# Altium PCB 10ADCDC.PcbDoc
Units mm, origin at the board's own origin, x right, y up, seen from the top; angles counter-clockwise.
Board outline 36 x 25 mm, 4 copper layers (Top Layer, Int1 (GND), Int2 (PWR), Bottom Layer), stack 1.585 mm thick; 44 components, 18 nets, 107 pads, 110 vias.
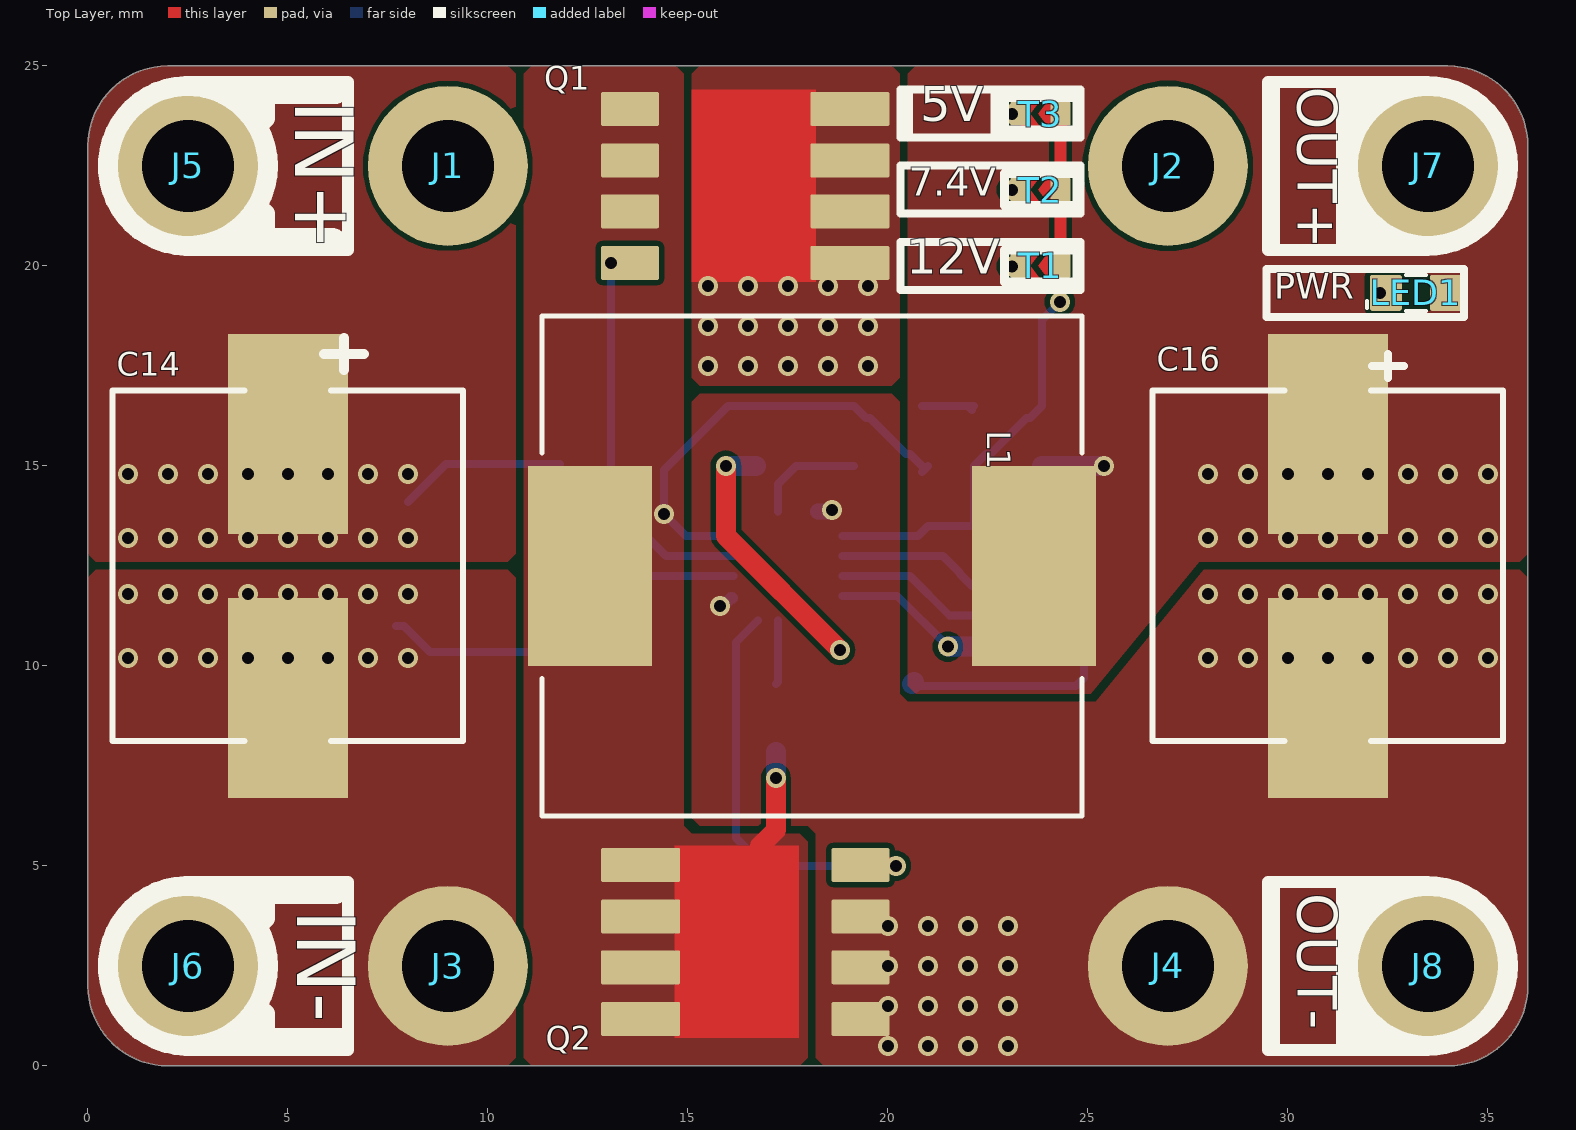
[diagram p0: Top Layer view]
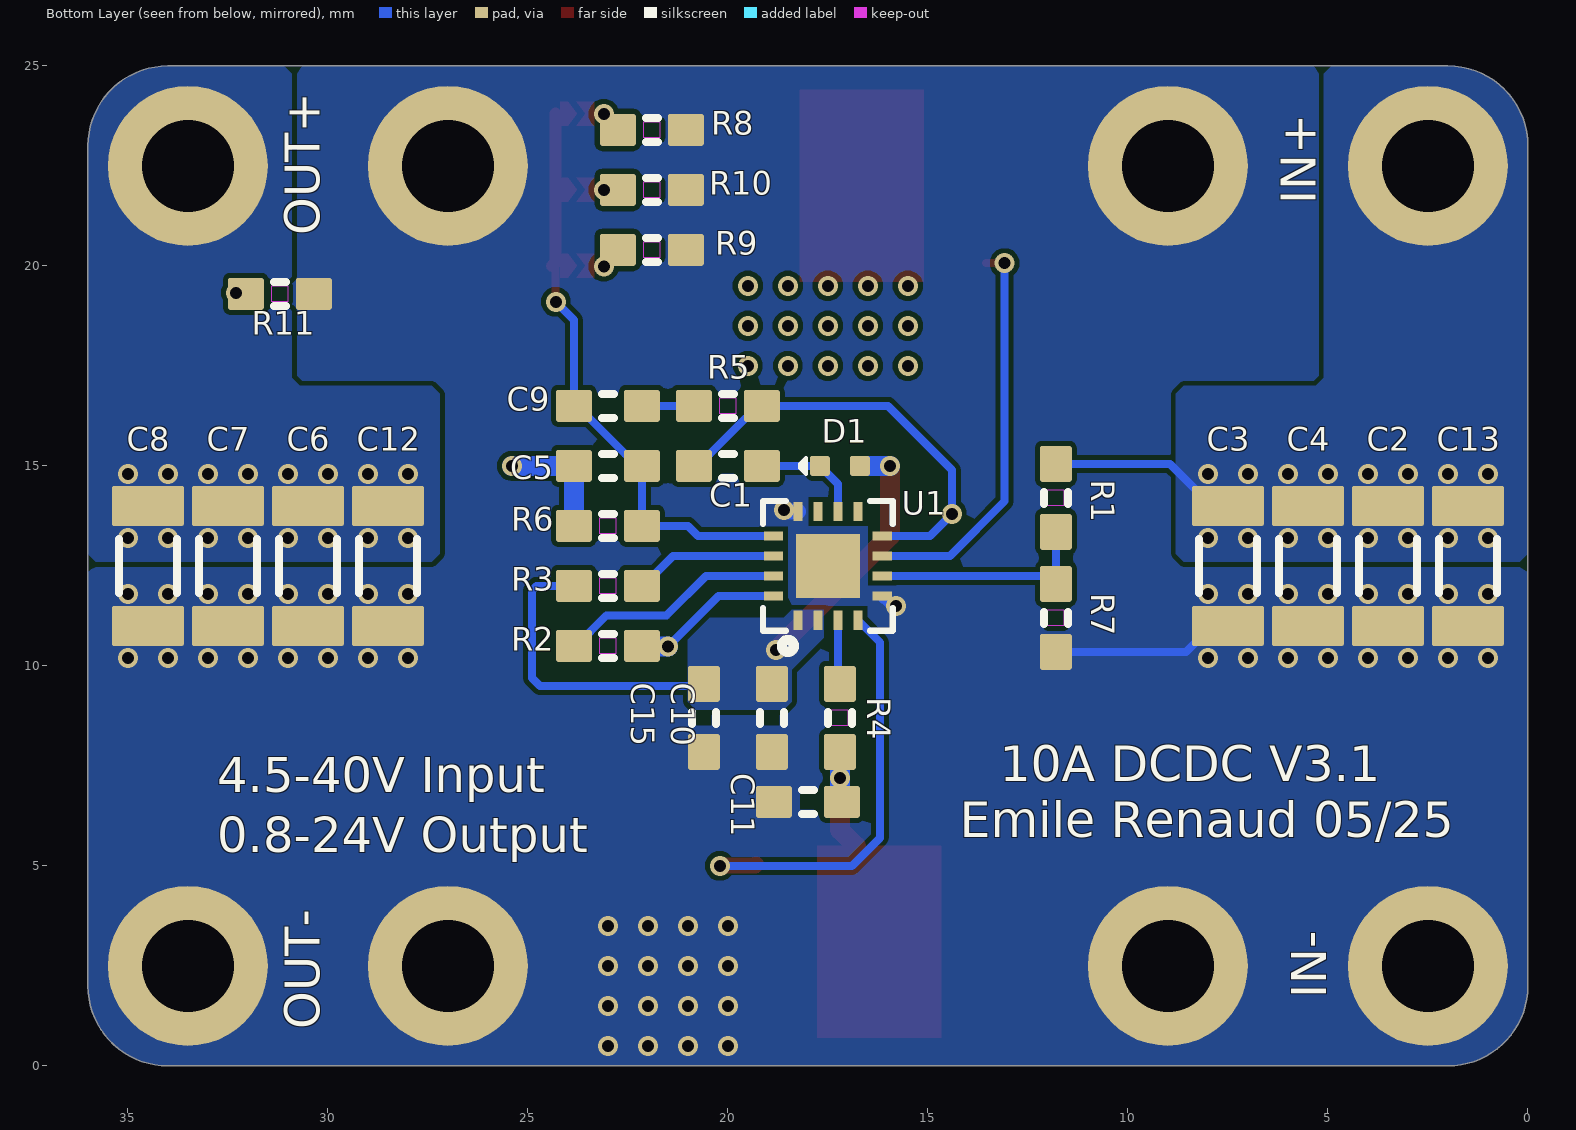
[diagram p1: Bottom Layer view, seen from below]
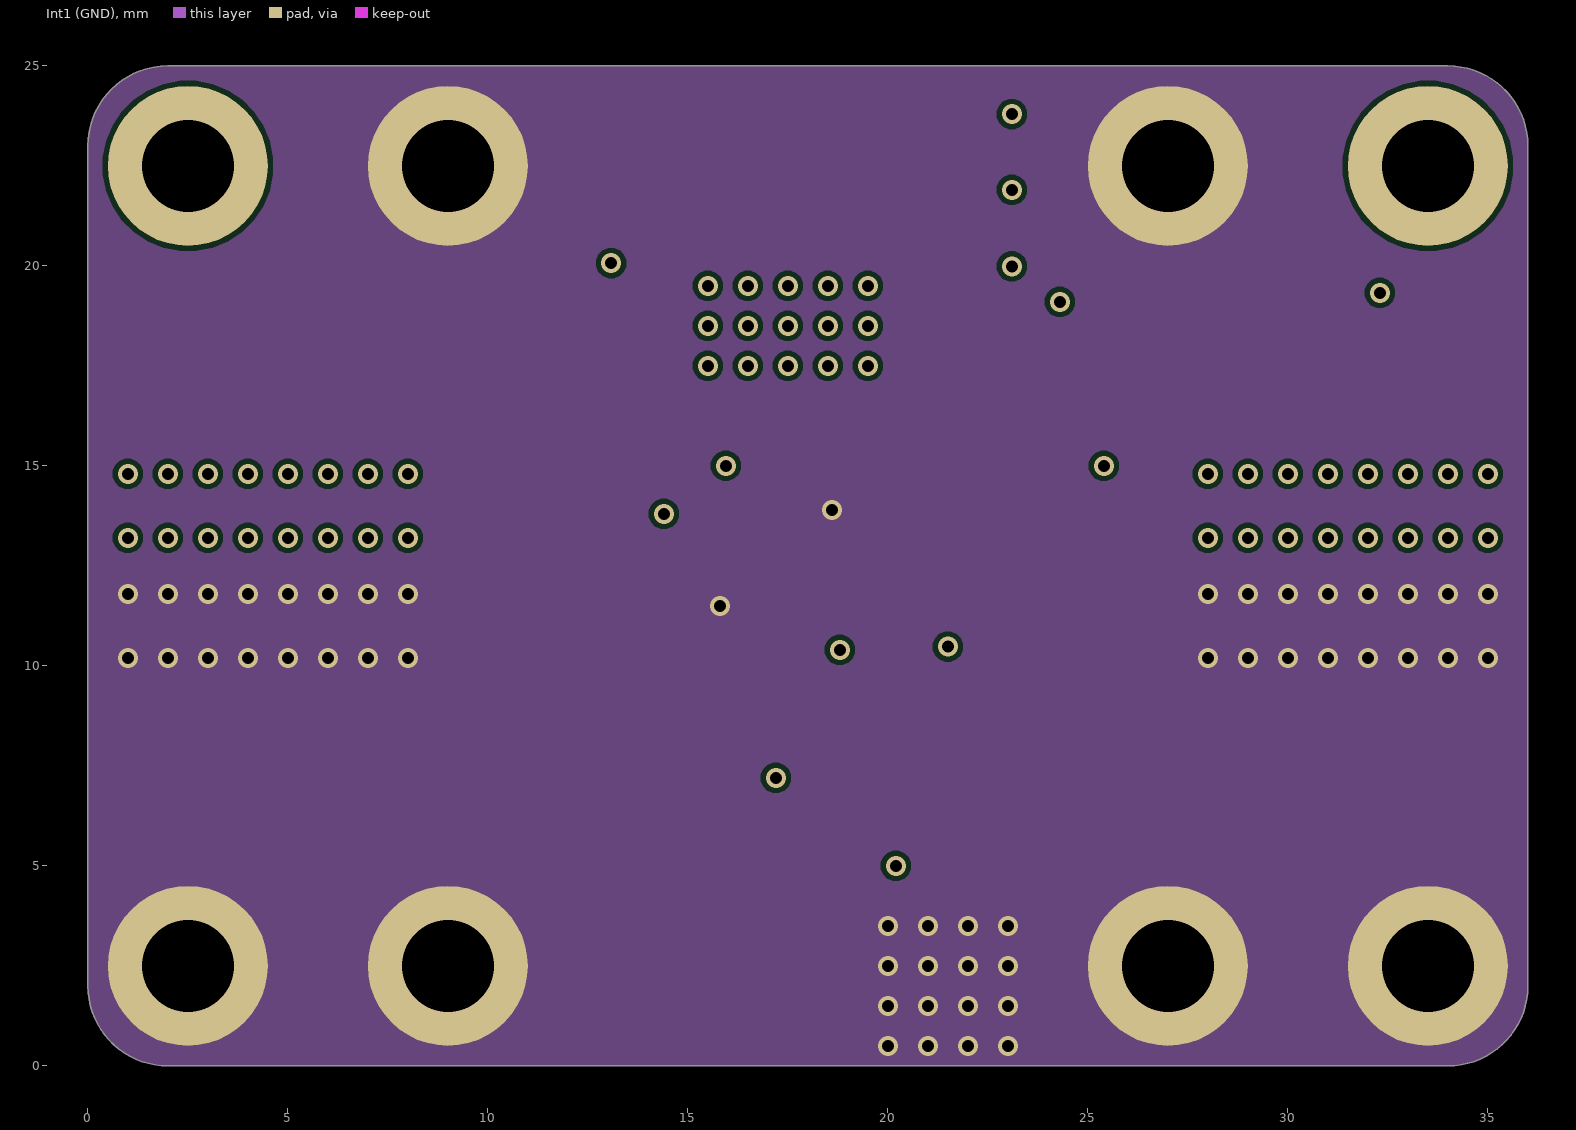
[diagram p2: Int1 (GND)]
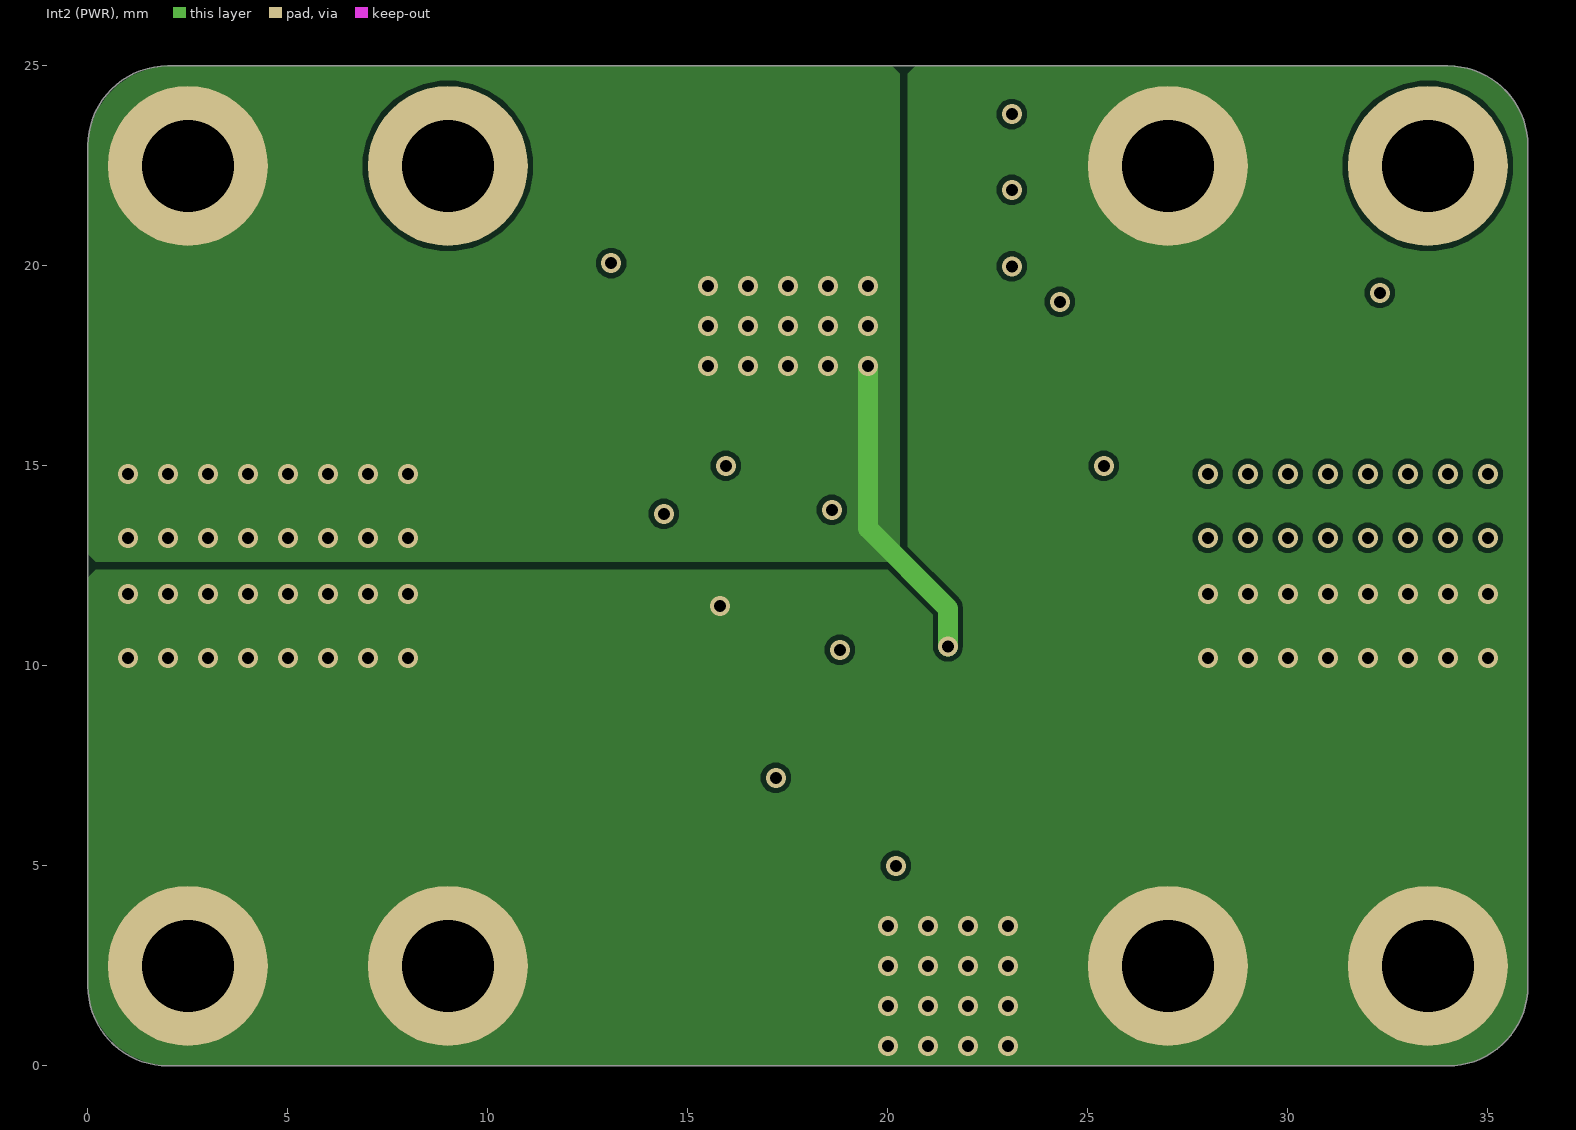
[diagram p3: Int2 (PWR)]
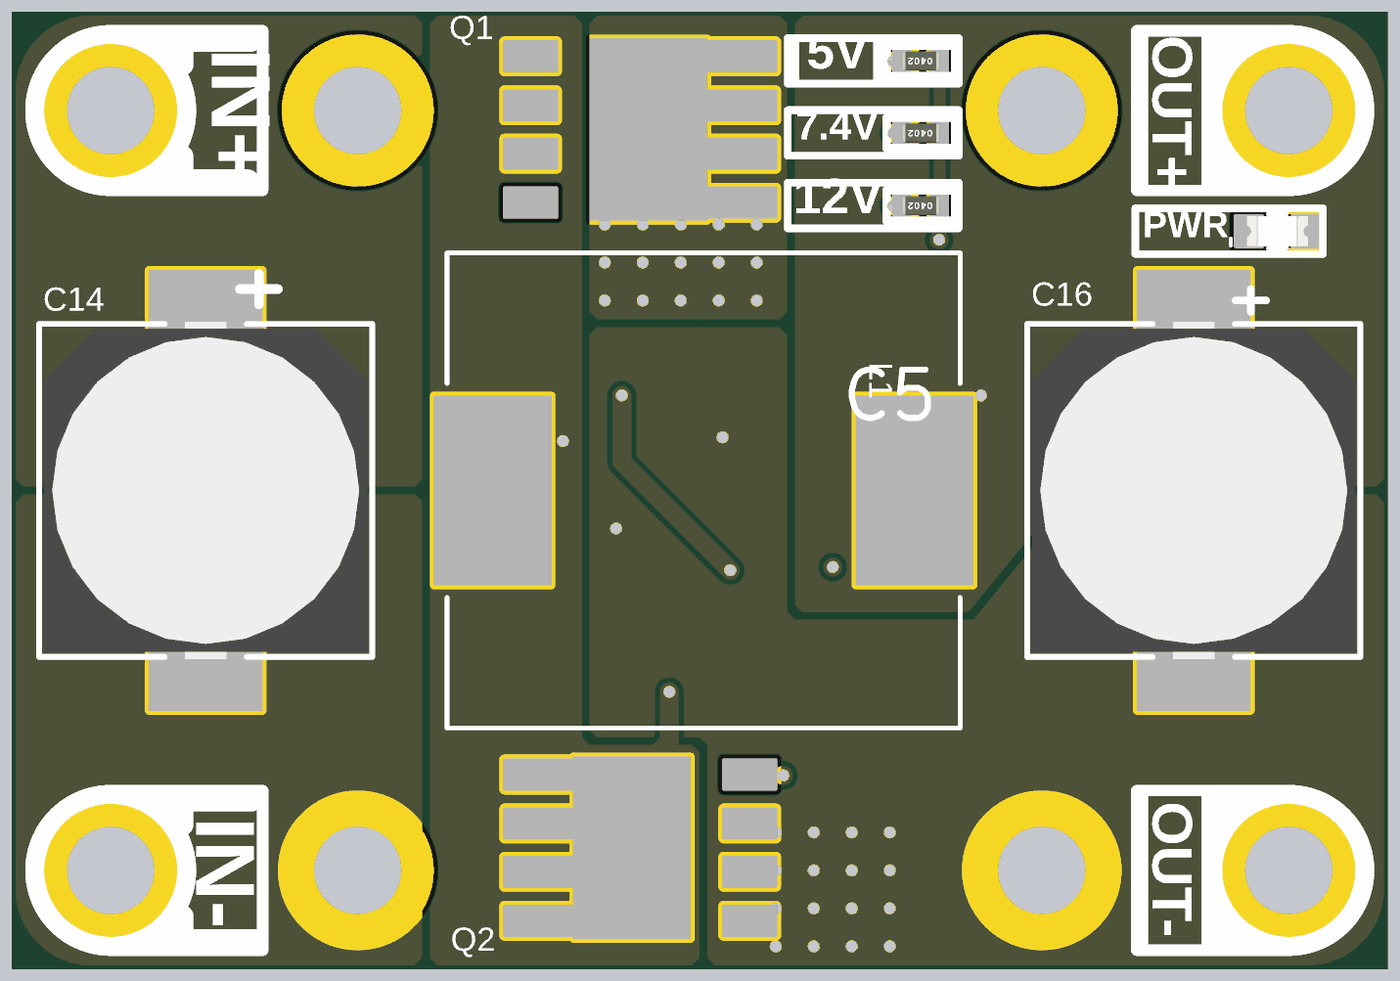
[diagram p4: 3D render of the assembled board from above, using the file's embedded part models]
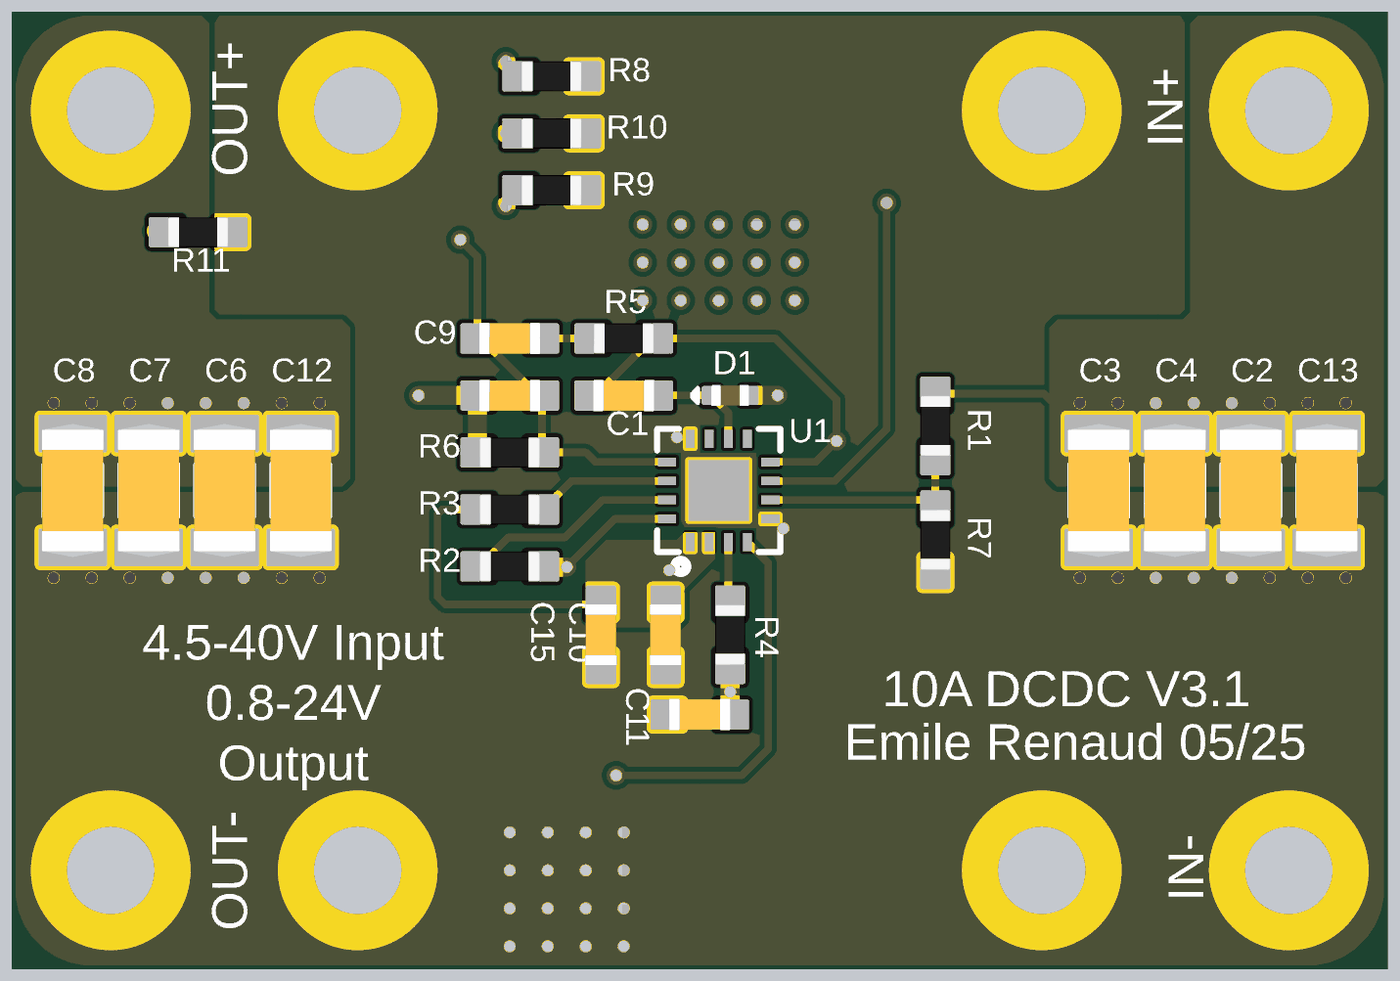
[diagram p5: 3D render of the assembled board from below, using the file's embedded part models]

## Layer stack, top to bottom
Top Solder: solder mask 0.035, SM-001, Dk 4
Top Layer: signal copper 0.035
Dielectric 2: prepreg 0.21, PP-017, Dk 4.6
Int1 (GND): signal copper 0.015
Dielectric 3: core 1.065, Core-039, Dk 4.6
Int2 (PWR): signal copper 0.015
Dielectric 4: prepreg 0.21, PP-017, Dk 4.6
Bottom Layer: signal copper 0.035
Bottom Solder: solder mask 0.035, SM-001, Dk 4

## Board outline
0,2 0,23 cw(c2,23) 2,25 34,25 cw(c34,23) 36,23 36,2 cw(c34,2) 34,0 2,0 cw(c2,2)

## Design rules (kind name [scope] priority, off if disabled: settings)
Clearance Clearance_Power [InNetClass('Power')] p1: gap=0.3 ignorepadtopadclearanceinfootprint=FALSE except(0.127: SMDPad-SMDPad SMDPad-THPad SMDPad-Via SMDPad-Fill SMDPad-Poly SMDPad-Region SMDPad-Text SMDPad-Hole THPad-THPad THPad-Via THPad-Fill THPad-Poly THPad-Region THPad-Text THPad-Hole)
Clearance Clearance_signal [All] p2: gap=0.125 ignorepadtopadclearanceinfootprint=FALSE
ComponentClearance [All] p1 off: gap=0.254 collisioncheckmode=3 verticalgap=0.254 showdistances=FALSE
HoleSize [All] p1 off: absolutevalues=TRUE maxlimit=2.54 minlimit=0.025 maxpercent=80.000 minpercent=20.000
MinimumSolderMaskSliver [All] p1 off: minsoldermaskwidth=0.254
PasteMaskExpansion [All] p1 off: expansion=0
PolygonConnect PolygonConnect_Power [InNetClass('Power')] p1: connectstyle=Direct reliefconductorwidth=0.254 reliefentries=4 polygonreliefangle="90 Angle" airgapwidth=0.254
PolygonConnect [All] p2: connectstyle=Direct reliefconductorwidth=0.254 reliefentries=4 polygonreliefangle="90 Angle" airgapwidth=0.254
RoutingVias [All] p1: holewidth=0.3 width=0.5 viastyle="Through Hole" minholewidth=0.15 minwidth=0.25 maxholewidth=1 maxwidth=1.3
SilkToSolderMaskClearance [IsPad] p1 off: minsilkscreentomaskgap=0.254 clearancetoexposedcopper=TRUE
SolderMaskExpansion [All] p1 off: expansion=0.102 istentingtop=FALSE
Width Width_Power(5A) [InNetClass('Power')] p1: maxlimit=2 minlimit=0.5 preferedwidth=1.25 minimp=50.000000 maximp=50.000000 favimp=50.000000
Width Width_signal [All] p2: maxlimit=1 minlimit=0.1 preferedwidth=0.2 minimp=50.000000 maximp=50.000000 favimp=50.000000
25 further rules are at their usual default settings.

## Components (designator, comment, footprint, x,y, rotation, side; value= is the part's Value field where it differs from the comment)
C1 "Capacitor-0603-0.1uF-50V-X7R" CAPACITOR-0603 20,15 r180 bottom value=0.1uF
C2 "Capacitor-1206-10uF-50V-X5R" CAPACITOR-1206 3.5,12.5 r90 bottom value=10uF
C3 "Capacitor-1206-10uF-50V-X5R" CAPACITOR-1206 7.5,12.5 r90 bottom value=10uF
C4 "Capacitor-1206-10uF-50V-X5R" CAPACITOR-1206 5.5,12.5 r90 bottom value=10uF
C5 "Capacitor-0603-0.1uF-50V-X7R" CAPACITOR-0603 23,15 r0 bottom value=5.6nF
C6 "Capacitor-1206-10uF-50V-X5R" CAPACITOR-1206 30.5,12.5 r90 bottom value=10uF
C7 "Capacitor-1206-10uF-50V-X5R" CAPACITOR-1206 32.5,12.5 r90 bottom value=10uF
C8 "Capacitor-1206-10uF-50V-X5R" CAPACITOR-1206 34.5,12.5 r90 bottom value=10uF
C9 "Capacitor-0603-0.1uF-50V-X7R" CAPACITOR-0603 23,16.5 r180 bottom value=0.1uF
C10 "Capacitor-0603-0.1uF-50V-X7R" CAPACITOR-0603 18.9,8.7 r90 bottom value=0.1uF
C11 "Capacitor-0603-10pF-50V-C0G" CAPACITOR-0603 18,6.6 r180 bottom value=10pF
C12 "Capacitor-1206-10uF-50V-X5R" CAPACITOR-1206 28.5,12.5 r90 bottom value=10uF
C13 "Capacitor-1206-10uF-50V-X5R" CAPACITOR-1206 1.5,12.5 r90 bottom value=10uF
C14 "CAP ALUM 100UF 20% 25V SMD" CAP_J-V_8X10P5_RUB 5,12.5 r270 top value=100uF
C15 "Capacitor-0603-1uF-25V-X5R" CAPACITOR-0603 20.6,8.7 r90 bottom value=1uF
C16 "CAP ALUM 100UF 20% 25V SMD" CAP_J-V_8X10P5_RUB 31,12.5 r270 top value=100uF
D1 "CDBQR0130L" Diode-0402 17.2,15 r0 bottom
J1 "hole" HOLE-M2-Bolt 9,22.5 r0 top
J2 "hole" HOLE-M2-Bolt 27,22.5 r0 top
J3 "hole" HOLE-M2-Bolt 9,2.5 r0 top
J4 "hole" HOLE-M2-Bolt 27,2.5 r0 top
J5 "hole" HOLE-M2-Bolt 2.5,22.5 r0 top
J6 "hole" HOLE-M2-Bolt 2.5,2.5 r0 top
J7 "hole" HOLE-M2-Bolt 33.5,22.5 r0 top
J8 "hole" HOLE-M2-Bolt 33.5,2.5 r0 top
L1 "SRP1265A-6R8M" IND_SRP1265A-6R8M 18.1,12.5 r0 top value=6.8uH
LED1 "3147-B1931NB--20C007614U1930CT-ND" LED-0603-2PIN 33.2,19.325 r0 top
Q1 "AONS66920" DFN-8-5x6-Power 16.3,22 r270 top
Q2 "AONS66920" DFN-8-5x6-Power 16.566,3.1 r90 top
R1 "SMT resistor" Resistor-0603 11.8,14.2 r90 bottom value=100k
R2 "SMT resistor" Resistor-0603 23,10.5 r180 bottom value=100k
R3 "SMT resistor" Resistor-0603 23,12 r0 bottom value=100k
R4 "SMT resistor" Resistor-0603 17.2,8.7 r270 bottom value=2.2k
R5 "SMT resistor" Resistor-0603 20,16.5 r180 bottom value=91k
R6 "SMT resistor" Resistor-0603 23,13.5 r0 bottom value=10k
R7 "SMT resistor" Resistor-0603 11.8,11.2 r90 bottom value=100k
R8 "SMT resistor" Resistor-0603 21.9,23.4 r0 bottom value=1.91k
R9 "SMT resistor" Resistor-0603 21.9,20.4 r0 bottom value=1.91k
R10 "SMT resistor" Resistor-0603 21.9,21.9 r0 bottom value=1.91k
R11 "SMT resistor" Resistor-0603 31.2,19.3 r0 bottom value=1.91k
T1 "NetTie_0402" NetTie-0402 23.814,20 r180 top
T2 "NetTie_0402" NetTie-0402 23.814,21.91 r180 top
T3 "NetTie_0402" NetTie-0402 23.814,23.806 r180 top
U1 "MIC2104YML-TR" "VQFN-16 3x3" 17.5,12.5 r90 bottom

## Footprints (in the part's own frame and the unit in brackets; to place one, negate y for a bottom-side part, rotate by r counter-clockwise, add the part's x,y. Pads: shape width x height; smd on the part's side, far side on the other; paste and mask are expansions set on the pad)
CAP_J-V_8X10P5_RUB [mm]
  rect 5x3 smd paste+0: 1(-3.302,0) 2(3.302,0)
  silkscreen extent -4.38,-4.38 4.38,4.38, body extent -4.45,-4.25 4.45,4.25, height 10.54
CAPACITOR-0603 [mm] "Metric 1608, EIA 0603. Per Yageo Product Specification V2.2"
  rrect15% 0.9x0.8 smd: 1(-0.85,0) 2(0.85,0)
  Top Layer pour cut-out: -0.2,0.2 0.2,0.2 0.2,-0.2 -0.2,-0.2
  silkscreen extent -0.15,-0.3 0.15,0.3, body extent -0.93,-0.41 0.93,0.41, height 0.81
CAPACITOR-1206 [mm] "Metric 3216, EIA 1206, Per Yageo Product Specification V2.2"
  rrect10% 1x1.8 smd: 1(-1.5,0) 2(1.5,0)
  silkscreen extent -0.67,-0.72 0.67,0.72, body extent -1.75,-0.81 1.75,0.81, height 1.61
DFN-8-5x6-Power [mm] "PowerVDFN 8 pins, per Toshiba SOP Advance https://toshiba.semicon-storage.com/ap-en/design-support/package/detail.SOP%20Advance.html"
  rrect10% 0.85x1.45 smd: 1(-1.925,-2.75) 2(-0.635,-2.75) 3(0.635,-2.75) 4(1.925,-2.75)
  rrect10% 0.85x1.981 smd: 5(1.925,2.75) 6(0.635,2.75) 7(-0.635,2.75) 8(-1.925,2.75)
  Top Layer region: -2.4,1.9 2.4,1.9 2.4,-1.2 -2.4,-1.2
  body extent -2.5,-2.5 2.5,2.5, height 0.96
Diode-0402 [mm] "Metric 1005, EIA 0402. Per Yageo Product Specification V2.6"
  rrect25% 0.5x0.5 smd: 1(-0.5,0) 2(0.5,0)
  Top Layer pour cut-out: -0.3,0.25 0.3,0.25 0.3,-0.25 -0.3,-0.25
  silkscreen extent 0.85,-0.2 1,0.2, body extent -0.5,-0.27 0.5,0.28, height 0.51
HOLE-M2-Bolt [mm] "Hole M2 Bolt"
  round 4 hole 2.3: 1(0,0)
IND_SRP1265A-6R8M [mm]
  rect 3.1x5 smd: 1(-5.55,0) 2(5.55,0)
  silkscreen extent -6.75,-6.25 6.75,6.25, body extent -6.7,-6.2 6.7,6.2, height 6.4
LED-0603-2PIN [mm] "Metric 1608, EIA 0603. Per Yageo Product Specification V2.2"
  rrect15% 0.8x0.9 smd: 1(-0.75,0) 2(0.75,0)
  Top Layer pour cut-out: -0.35,0.45 0.35,0.45 0.35,-0.45 -0.35,-0.45
  silkscreen extent -1.22,-0.45 0.25,0.45, body extent -0.8,-0.4 0.8,0.4, height 0.8
NetTie-0402 [mm] "Metric 1005, EIA 0402 Drawn per Yageo \"Chip resistors Mounting\" rev 10"
  rrect15% 0.5x0.6 smd: 1(-0.5,0) 2(0.5,0)
  Top Layer region: -0.375,0.3 -0.175,0.3 0.05,0 -0.175,-0.3 -0.375,-0.3
  Top Layer region: 0.475,0.3 0.025,0.3 0.25,0 0.025,-0.3 0.375,-0.3 0.475,-0.3
  body extent -0.51,-0.25 0.51,0.25, height 0.51
Resistor-0603 [mm] "Metric 1608, EIA 0603 Drawn per Yageo \"Chip resistors Mounting\" rev 10"
  rrect15% 0.9x0.8 smd: 1(-0.85,0) 2(0.85,0)
  Top Layer pour cut-out: -0.2,0.2 0.2,0.2 0.2,-0.2 -0.2,-0.2
  Top Layer keep-out region: -0.2,0.2 0.2,0.2 0.2,-0.2 -0.2,-0.2
  silkscreen extent -0.15,-0.3 0.15,0.3, body extent -0.8,-0.4 0.8,0.4, height 0.55
"VQFN-16 3x3" [mm]
  rect 0.48x0.23 smd paste+0 mask+0.08: 1(-1.36,0.75) 2(-1.36,0.25) 3(-1.36,-0.25) 4(-1.36,-0.75) 9(1.36,-0.75) 10(1.36,-0.25) 11(1.36,0.25) 12(1.36,0.75)
  rect 0.23x0.48 smd paste+0 mask+0.08: 5(-0.75,-1.36) 6(-0.25,-1.36) 7(0.25,-1.36) 8(0.75,-1.36) 13(0.75,1.36) 14(0.25,1.36) 15(-0.25,1.36) 16(-0.75,1.36)
  rect 1.6x1.6 smd paste+0 mask+0.08: 17(0,0)
  silkscreen extent -2.15,-1.62 1.62,1.62, body extent -1.5,-1.5 1.5,1.5, height 0.91

## Part data
C1 C9 C10: Package / Case="Metric 1608, EIA 0603", Supplier Part Number 1=1276-1935-2-ND, Volt=50V, Mounted=Yes, Precision=X7R-10%, Supplier 1=Digi-Key, Supplier 2=Digi-Key, Supplier Part Number 2=1276-1934-2-ND
C2 C3 C4 C6 C7 C8 C12 C13: Package / Case="Metric 3216, EIA 1206", Supplier Part Number 1=1276-2876-1-ND, Volt=50V, Mounted=Yes, Precision=X5R-10%, Supplier 1=Digi-Key, Supplier 2=Digi-Key
C5: library part Capacitor-0603-5.6nF-50V-X7R, "Capacitor-0603-5.6nF-50V-X7R", Package / Case="Metric 1608, EIA 0603", Supplier Part Number 1=311-4100-1-ND, Volt=50V, Mounted=Yes, Precision=X7R-10%, Supplier 1=Digi-Key, Supplier 2=Digi-Key
C11: "10 pF ±5% 50V Ceramic Capacitor C0G 0603 (1608 Metric)", Package / Case="Metric 1608 , EIA 0603", Supplier Part Number 1=311-1058-1-ND, Volt=50V, Mounted=Yes, Precision=X5R-10%, Supplier 1=Digikey
C14 C16: library part Capacitor-100uF-50V-SMD, "CAP ALUM 100UF 20% 50V SMD", Supplier Part Number 1=1189-1651-1-ND, Volt=50V, Mounted=Yes, Precision=20%, Supplier 1=Digi-Key, Supplier 2=Digi-Key
C15: Package / Case="Metric 1608, EIA 0603", Supplier Part Number 1=1276-1859-2-ND, Volt=25V, Mounted=Yes, Precision=X5R-10%, Supplier 1=Digi-Key, Supplier 2=Digi-Key, Supplier Part Number 2=1276-1942-2-ND
D1: "Diode SCHOTTKY  30 V 100mA Surface Mount 0402/SOD-923F", Package / Case=0402/SOD-923F, Supplier Part Number 1=641-1271-1-ND, Volt=30, Mounted=Yes, Supplier 1=Digi-Key
J1 J2 J3 J4 J5 J6 J7 J8: library part "Hole 2.3mm M2", "Hole for M2 Bolt with 4mm pad", Mounted=N/A
L1: "6.8 µH Shielded Drum Core, Wirewound Inductor 11.5 A 11.5mOhm Max Nonstandard", Current=11.5A, Package / Case=SMD, Supplier Part Number 1=SRP1265A-6R8MCT-ND, HelpURL=https://www.bourns.com/docs/Product-Datasheets/SRP1265A.pdf, Mounted=Yes, Supplier 1=Digi-Key
LED1: library part LED_BLUE, "LED BLUE CLEAR 0603 SMD", Package / Case="0603 (1608 Metric)", Mounted=Yes, Supplier 1=Digi-Key, Supplier Part Number 1=3147-B1931NB--20C007614U1930CT-ND
Q1 Q2: "N-Channel 100 V 17.5A (Ta), 48A (Tc) 5W (Ta), 56.5W (Tc) Surface Mount 8-DFN (5x6)", Current=17.5A/48A, Package / Case="8-DFN-EP (3x3)", Supplier Part Number 1=785-1843-1-ND, Volt=60V, Help URL=https://cms.aosmd.com/api/product/2026/combine-support-documents?resources=2241,4431,4739,6665,6939, Mounted=Yes, Supplier 1=Digi-Key
R1 R2 R3 R7: library part Resistor-0603-100k, "Resistor0603-100k", Package / Case="Metric 1608, EIA 0603", Supplier Part Number 1=311-100KHRCT-ND, Mounted=Yes, Precision=1%, Supplier 1=Digi-Key, Watt=0.1W
R4: library part Resistor-0603-2.2k, "Resistor0603-2.2k", Package / Case="Metric 1608, EIA 0603", Supplier Part Number 1=311-2.20KHRCT-ND, Mounted=Yes, Precision=1%, Supplier 1=Digi-Key, Watt=0.1W
R5: library part Resistor-0603-91k, "Resistor0603-91k", Package / Case="Metric 1608, EIA 0603", Supplier Part Number 1=311-91.0KHRCT-ND, Mounted=Yes, Precision=1%, Supplier 1=Digi-Key, Watt=0.1W
R6: library part Resistor-0603-10k, "Resistor0603-10k", Package / Case="Metric 1608, EIA 0603", Supplier Part Number 1=311-10.0KHRTR-ND, Mounted=Yes, Precision=1%, Supplier 1=Digi-Key, Watt=0.1W
R8 R9 R10 R11: library part Resistor-0603-1.91k, "Resistor0603-1.91k", Package / Case="Metric 1608, EIA 0603", Supplier Part Number 1=311-1.91KHRCT-ND, Mounted=Yes, Precision=1%, Supplier 1=Digi-Key, Watt=0.1W
U1: "Buck Regulator Positive Output Step-Down DC-DC Controller IC 16-MLF® (3x3)", Package / Case="16-VFQFN Exposed Pad", Supplier Part Number 1=576-4157-1-ND, Grade=None, HelpURL=https://ww1.microchip.com/downloads/aemDocuments/documents/OTH/ProductDocuments/DataSheets/MIC2103_4-75V-Synchronous-Buck-Controllers-Featuring-Adaptive-ON-Time-Control-DS20005899B.pdf, Mounted=Yes, Supplier 1=Digi-Key

## Via types
v1: diameter 0.5, hole 0.3, Top Layer to Bottom Layer, tented both sides, 110 vias

## Nets (pads, with @x,y where several pads share a name; then routed paths per layer and width w, separated by ;. In a path a pad name is that pad's centre, name@x,y a point inside that pad or via, vN(x,y) a via of type N, cw(c..) or ccw(c..) an arc to the next point about the centre after c; other vN are vias at no path point)
GND: C2.1 C3.1 C4.1 C6.1 C7.1 C8.1 C10.1 C11.1 C12.1 C13.1 C14.2 C15.1 C16.2 J1.1 J2.1 J3.1 J4.1 J6.1 J8.1 Q2.1 Q2.2 Q2.3 R7.1 R8.1 R9.1 R10.1 R11.1 U1.5 U1.12 U1.17 | length 5.5
  Bottom Layer w0.2: C3.1@7.7,11 7.9,11 8.55,10.35 R7.1 ; v1@18.56,13.86 v1(18.6,13.9)
  Bottom Layer w0.3: v1(15.8,11.5) 15.881,11.5 16.081,11.7 U1.5@16.1,11.7
  Bottom Layer w0.4: U1.12 v1@18.56,13.86
  Bottom Layer w0.5: J4.1@27.65,2.5 J4.1@28,2.5
  other v1: 20,0.5 21,0.5 22,0.5 23,0.5 20,1.5 21,1.5 22,1.5 23,1.5 20,2.5 21,2.5 22,2.5 23,2.5 20,3.5 21,3.5 22,3.5 23,3.5 1,10.2 2,10.2 3,10.2 4,10.2 5,10.2 6,10.2 7,10.2 8,10.2 28,10.2 29,10.2 30,10.2 31,10.2 32,10.2 33,10.2 34,10.2 35,10.2 1,11.8 2,11.8 3,11.8 4,11.8 5,11.8 6,11.8 7,11.8 8,11.8 28,11.8 29,11.8 30,11.8 31,11.8 32,11.8 33,11.8 34,11.8 35,11.8
NetC1_1: C1.1 C11.2 L1.1 Q1.1 Q1.2 Q1.3 Q2.5 Q2.6 Q2.7 Q2.8 R4.2 R5.2 U1.8 | length 13.7
  Top Layer w0.5: 16.8,5.5 17.2,5.9 v1(17.2,7.2)
  Bottom Layer w0.2: U1.8 14.95,13.25 v1(14.4,13.8) 14.4,14.9 16,16.5 R5.2@19.096,16.5 ; R5.2 19.45,16.2 19.553,16.2 20.453,15.3 20.55,15.3 C1.1 ; C1.1@20.85,14.85 C1.1@21,15
  Bottom Layer w0.5: C11.2@17.2,7 v1(17.2,7.2) R4.2
NetC1_2: C1.2 D1.2 U1.10 | length 2.8
  Bottom Layer w0.2: U1.10 17.25,14.55 D1.2 C1.2
NetC5_1: C5.1 C9.1 R6.1 T1.1 T2.1 T3.1 U1.13 | length 14.7
  Top Layer w0.2: v1(24.3,19.1) 24.307,19.107 24.307,19.993 T1.1@24.3,20
  Top Layer w0.3: T3.1 T2.1 24.314,20.086 T1.1@24.4,20
  Bottom Layer w0.2: U1.13 20.75,13.25 21,13.5 R6.1 C5.1 22.45,15.3 22.568,15.3 23.468,16.2 23.55,16.2 C9.1 23.85,18.65 v1(24.3,19.1)
NetC9_2: C9.2 R5.1 | length 1.4
  Bottom Layer w0.2: R5.1 C9.2@22,16.5 ; C9.2@22.1,16.4 C9.2@22,16.5 ; C9.2 C9.2@22,16.5
NetLED1_1: LED1.1 R11.2
  other v1: 32.3,19.325
NetQ1_4: Q1.4 U1.7 | length 10.1
  Top Layer w0.2: v1(13.082,20.069) 13.088,20.075 Q1.4
  Bottom Layer w0.2: v1@13.1,20.1 13.082,20.082 v1(13.082,20.069) 13.082,14.118 14.45,12.75 U1.7
NetQ2_4: Q2.4 U1.4 | length 10.9
  Top Layer w0.2: Q2.4@19.3,5.041 Q2.4
  Top Layer w0.4: Q2.4@19.3,5.041 19.328,5.012 20.188,5.012 v1(20.2,5)
  Bottom Layer w0.2: U1.4 16.2,10.59 16.2,5.7 16.9,5 v1(20.2,5)
NetR1_1: R1.1 R7.2 U1.6 | length 5.6
  Bottom Layer w0.2: R1.1 11.8,12.2 11.9,12.1 12.05,12.25 U1.6
NetR2_1: R2.1 U1.15 | length 5.7
  Bottom Layer w0.2: U1.15 20.55,12.25 21.534,11.266 23.034,11.266 23.8,10.5 R2.1
NetR3_1: R3.1 U1.14 | length 3.7
  Bottom Layer w0.2: U1.14 21.375,12.75 21.8,12.325 21.8,12.3 22.1,12 R3.1@22.259,12
NetR4_1: R4.1 U1.3 | length 1.6
  Bottom Layer w0.2: R4.1 17.25,9.6 U1.3
NetR8_2: R8.2 T3.2
  other v1: 23.1,23.796
NetR9_2: R9.2 T1.2
  other v1: 23.1,19.99
NetR10_2: R10.2 T2.2
  other v1: 23.1,21.9
VDD: C10.2 C15.2 D1.1 R3.2 U1.1 U1.2 | length 14.3
  Top Layer w0.5: v1(15.949,15.004) 15.949,13.251 v1(18.8,10.4)
  Bottom Layer w0.2: C15.2 20.65,9.5 24.7,9.5 24.9,9.7 24.9,11.883 24.783,12 R3.2
  Bottom Layer w0.5: v1(15.949,15.004) 15.953,15 D1.1 ; C15.2 C15.2@20.649,9.599
VIN: C2.2 C3.2 C4.2 C13.2 C14.1 J5.1 Q1.5 Q1.6 Q1.7 Q1.8 R1.2 R2.2 U1.16 | length 15.9
  Int2 (PWR) w0.5: v1(19.5,17.5) 19.5,13.44 21.499,11.441 v1(21.499,10.483)
  Bottom Layer w0.2: C3.2@8,14.1 8.95,15.05 R1.2 ; U1.16 20.232,11.75 v1(21.499,10.483)
  Bottom Layer w0.5: v1(21.499,10.483) 22.133,10.483 R2.2
  other v1: 1,13.2 2,13.2 3,13.2 4,13.2 5,13.2 6,13.2 7,13.2 8,13.2 1,14.8 2,14.8 3,14.8 4,14.8 5,14.8 6,14.8 7,14.8 8,14.8 15.5,17.5 16.5,17.5 17.5,17.5 18.5,17.5 15.5,18.5 16.5,18.5 17.5,18.5 18.5,18.5 19.5,18.5 15.5,19.5 16.5,19.5 17.5,19.5 18.5,19.5 19.5,19.5
VOUT: C5.2 C6.2 C7.2 C8.2 C12.2 C16.1 J7.1 L1.2 LED1.2 R6.2 | length 3.1
  Bottom Layer w0.5: R6.2 C5.2@23.85,14.95 ; v1(25.4,15) C5.2@23.9,15 ; C5.2@23.85,14.95 C5.2@23.9,15 ; C5.2@23.85,14.95 C5.2 C5.2@23.9,15
  other v1: 28,13.2 29,13.2 30,13.2 31,13.2 32,13.2 33,13.2 34,13.2 35,13.2 28,14.8 29,14.8 30,14.8 31,14.8 32,14.8 33,14.8 34,14.8 35,14.8
pads on no net: U1.9 U1.11

## Polygon pours and split planes (outlines as drawn)
GND on Top Layer "GND_L01_P040" (solid, remove dead copper, pour order 40): 18.4,0 18.2,0.2 18.2,5.8 18,6 15.3,6 15.1,6.2 15.1,16.6 15.3,16.8 20.1,16.8 20.3,16.6 20.3,9.3 20.5,9.1 25.2,9.1 27.9,12.4 35.8,12.4 36,12.2 36,2 cw(c34,2) 34,0
VOUT on Top Layer "VOUT_L01_P025" (solid, remove dead copper, pour order 25): 35.8,12.6 36,12.8 36,23 ccw(c34,23) 34,25 20.7,25 20.5,24.8 20.5,9.5 20.7,9.3 25.071,9.3 27.782,12.6
VIN on Top Layer "VIN_L01_P032" (solid, remove dead copper, pour order 32): 0.2,12.6 0,12.8 0,23 cw(c2,23) 2,25 10.5,25 10.7,24.8 10.7,12.8 10.5,12.6
GND on Top Layer "GND_L01_P029" (solid, remove dead copper, pour order 29): 0,12.2 0.2,12.4 10.5,12.4 10.7,12.2 10.7,0.2 10.5,0 2,0 cw(c2,2) 0,2
NetC1_1 on Top Layer "NETC1_1_L01_P019" (solid, remove dead copper, pour order 19): 14.9,6 15.1,5.8 17.8,5.8 18,5.6 18,0.2 17.8,0 11.1,0 10.9,0.2 10.9,24.8 11.1,25 14.7,25 14.9,24.8
VIN on Top Layer "VIN_L01_P020" (solid, remove dead copper, pour order 20): 15.1,24.8 15.3,25 20.1,25 20.3,24.8 20.3,17.2 20.1,17 15.3,17 15.1,17.2
VOUT on Bottom Layer "VOUT_L04_P038" (solid, remove dead copper, pour order 38): 35.8,12.6 36,12.8 36,23 ccw(c34,23) 34,25 31.1,25 30.9,24.8 30.9,17.2 30.7,17 27.4,17 27.2,16.8 27.2,12.8 27.4,12.6
GND on Bottom Layer "GND_L04_P039" (solid, remove dead copper, pour order 39): 0,2 0,23 cw(c2,23) 2,25 34,25 cw(c34,23) 36,23 36,2 cw(c34,2) 34,0 2,0 cw(c2,2)
VIN on Bottom Layer "VIN_L04_P034" (solid, remove dead copper, pour order 34): 0.2,12.6 0,12.8 0,23 cw(c2,23) 2,25 4.9,25 5.1,24.8 5.1,17.2 5.3,17 8.6,17 8.8,16.8 8.8,12.8 8.6,12.6
GND on Bottom Layer "GND_L04_P027" (solid, pour order 27): 18.4,6.7 18.9,6.2 20.8,6.2 21,6.4 21,8.3 20.8,8.5 18.6,8.5 18.4,8.3
VDD on Bottom Layer "VDD_L04_P026" (solid, remove dead copper, pour order 26): 17.6,10.7 18.4,9.9 18.4,9.1 18.6,8.9 20.8,8.9 21,9.1 21,11 20.8,11.2 18.6,11.2 18.4,11.4 17.6,11.4
GND on Int2 (PWR) "GND_L03_P035" (solid, remove dead copper, pour order 35): 36,23 ccw(c34,23) 34,25 20.7,25 20.5,24.8 20.5,12.4 0.2,12.4 0,12.2 0,2.1 ccw(c2.1,2.1) 2.1,0 34,0 ccw(c34,2) 36,2
VIN on Int2 (PWR) "VIN_L03_P028" (solid, remove dead copper, pour order 28): 0.2,12.6 0,12.8 0,22.9 cw(c2.1,22.9) 2.1,25 20.1,25 20.3,24.8 20.3,12.8 20.1,12.6
GND on Int1 (GND) "GND_L02_P033" (solid, remove dead copper, pour order 33): 0,2 0,23 cw(c2,23) 2,25 34,25 cw(c34,23) 36,23 36,2 cw(c34,2) 34,0 2,0 cw(c2,2)

## Silkscreen, mask and mechanical layers (free items; w line width, h text height)
Top Overlay:
  circle w0.5: c33.5,2.5 r2
  circle w0.5: c33.5,22.5 r2
  circle w0.5: c2.5,22.5 r2
  circle w0.5: c2.5,2.5 r2
  lines w0.2: 29.461,18.725 29.461,19.925 ; 29.475,18.725 32.075,18.725 33.875,18.725 34.4,18.725 34.4,19.925 33.875,19.925 29.475,19.925 ; 29.7,0.5 29.7,4.5 ; 29.7,20.5 29.7,24.5 ; 31.3,0.5 31.3,4.5 ; 31.3,20.5 31.3,24.5 ; 31.7,0.5 31.7,1.2 ; 31.7,3.8 31.7,4.5 ; 31.7,20.5 31.7,21.2 ; 31.7,23.8 31.7,24.5 ; 32.1,17.5 32.9,17.5 32.5,17.5 ; 32.5,17.2 32.5,17.8 ; 24.714,19.4 24.814,19.4 24.814,20.6 24.714,20.6 ; 24.714,19.4 24.714,20.6 ; 24.714,19.4 22.914,19.4 20.314,19.4 20.314,20.6 24.714,20.6 ; 24.714,21.31 22.914,21.31 20.314,21.31 20.314,22.51 24.714,22.51 ; 24.714,21.31 24.714,22.51 ; 24.714,21.31 24.814,21.31 24.814,22.51 24.714,22.51 ; 24.714,23.206 22.914,23.206 20.314,23.206 20.314,24.406 24.714,24.406 ; 24.714,23.206 24.714,24.406 ; 24.714,23.206 24.814,23.206 24.814,24.406 24.714,24.406
  lines w0.22: 20.514,23.306 20.514,24.306 ; 22.914,23.406 24.614,23.406 ; 22.914,24.206 24.614,24.206 ; 24.614,19.6 22.914,19.6 22.914,20.4 24.614,20.4 ; 24.614,21.51 22.914,21.51 22.914,22.31 24.614,22.31
  lines w0.23: 22.914,23.406 22.914,24.206
  lines w0.25: 5.9,17.8 6.9,17.8 ; 6.4,17.4 6.4,18.2
  lines w0.3: 2.5,20.4 4.1,20.4 6.5,20.4 6.5,24.6 2.5,24.6 ; 2.5,0.4 6.5,0.4 6.5,4.6 2.5,4.6 ; 22.714,23.306 22.714,24.306 ; 31.5,0.6 31.5,1.6 ; 31.5,3.4 31.5,4.4 ; 31.5,20.6 31.5,21.6 ; 31.5,23.4 31.5,24.4 ; 31.9,0.5 31.9,1 ; 31.9,4 31.9,4.5 ; 31.9,20.5 31.9,21 ; 31.9,24 31.9,24.5 ; 33.5,0.4 29.5,0.4 29.5,4.6 33.5,4.6 ; 33.5,20.4 29.5,20.4 29.5,24.6 33.5,24.6
  lines w0.5: 3.8,0.7 6.3,0.7 ; 3.8,4.3 6.2,4.3 ; 3.8,20.7 6.1,20.7 cw(c6.1,20.6) 6.2,20.6 ; 3.8,24.3 6.2,24.3 ; 32.1,0.6 32.4,0.6 ; 32.1,4.4 32.4,4.4 ; 32.1,20.6 32.4,20.6 ; 32.1,24.4 32.4,24.4
  lines w0.55: 4.4,0.7 4.4,1.3 ; 4.4,3.7 4.4,4.3 ; 4.4,20.7 4.4,21.3 ; 4.4,23.7 4.4,24.3
  text "OUT+" at 29.919,24.479 h1.7 r270
  text "IN+" at 4.7,24.146 h2.5 r270
  text "5V" at 20.811,23.328 h1.5
  text "7.4V" at 20.522,21.515 h1.2
  text "12V" at 20.461,19.518 h1.5
  text "PWR" at 29.654,18.963 h1.1
  text "OUT-" at 29.919,4.316 h1.7 r270
  text "IN-" at 4.75,3.905 h2.5 r270
Bottom Overlay:
  text "IN+" at 5.02,21.538 h1.5 r270
  text "OUT+" at 29.916,20.763 h1.5 r270
  text "10A DCDC V3.1" at 13.2,6.818 h1.52
  text "Emile Renaud 05/25" at 14.2,5.417 h1.52
  text "4.5-40V Input / 0.8-24V Output" at 32.769,5.054 h1.5
  text "IN-" at 4.75,1.69 h1.5 r270
  text "OUT-" at 29.916,0.915 h1.5 r270
Board:
  lines w0.2: 34,25 cw(c34,23) 36,23 36,2 cw(c34,2) 34,0 2,0 cw(c2,2) 0,2 0,23 cw(c2,23) 2,25 34,25 ; 34,25 34,25